# EAGLE board CT_schematic (EAGLE 7.6.0)

Size 100 x 80 mm. Coordinates in mm from the lower left corner, seen from the top.
Outline: 0,0 100,0 100,80 0,80 0,0
Copper layers (1*16): Top 0.035mm / dielectric 1.5mm / Bottom 0.035mm
Design rules "default": minimum track width 10mil, minimum drill 24mil, track to track 8mil, track to pad 8mil, pad to pad 8mil, via to via 8mil, smd to smd 8mil, copper to edge 40mil, drill to drill 8mil, minimum pad ring 10mil, minimum via ring 8mil, stop-mask expansion 4mil, vias tented up to drill 0mil, thermal gap 10mil

## Footprints (pad centres in the part's own frame; a part is rotated, then mirrored left to right if it is on the bottom)
C0603 = smd 0.8 x 0.8: 1 -0.762,0; 2 0.762,0
C0402 = smd 0.5 x 0.5: 1 -0.508,0; 2 0.508,0
C0805 = smd 1.2 x 1.3: 1 -1.016,0; 2 1.016,0
C1210 = smd 1.2 x 2.5: 1 -1.524,0; 2 1.524,0
C1206 = smd 1.3 x 1.6: 1 -1.524,0; 2 1.524,0
EXV-9H = smd 3.505 x 1.676: 1 -2.857,0; 2 2.857,0
L0603 = smd 0.8 x 0.8: 1 -0.762,0; 2 0.762,0
L1210 = smd 1.2 x 2.5: 1 -1.524,0; 2 1.524,0
IND_PM3316 = smd 2.921 x 2.794: 1 -5.144,0; 2 5.144,0
PJ-037B_PACKAGE = drill 3.7 square: 1 12,0 | drill 3.2 square: 2 6,0
R0603 = smd 0.8 x 0.8: 1 -0.762,0; 2 0.762,0
WLCSP81 = smd 0.25 x 0.25: A1 -1.6,1.6; A2 -1.2,1.6; A3 -0.8,1.6; A4 -0.4,1.6; A5 0,1.6; A6 0.4,1.6; A7 0.8,1.6; A8 1.2,1.6; A9 1.6,1.6; B1 -1.6,1.2; B2 -1.2,1.2; B3 -0.8,1.2; B4 -0.4,1.2; B5 0,1.2; B6 0.4,1.2; B7 0.8,1.2; B8 1.2,1.2; B9 1.6,1.2; C1 -1.6,0.8; C2 -1.2,0.8; C3 -0.8,0.8; C4 -0.4,0.8; C5 0,0.8; C6 0.4,0.8; C7 0.8,0.8; C8 1.2,0.8; C9 1.6,0.8; D1 -1.6,0.4; D2 -1.2,0.4; D3 -0.8,0.4; D4 -0.4,0.4; D5 0,0.4; D6 0.4,0.4; D7 0.8,0.4; D8 1.2,0.4; D9 1.6,0.4; E1 -1.6,0; E2 -1.2,0; E3 -0.8,0; E4 -0.4,0; E5 0,0; E6 0.4,0; E7 0.8,0; E8 1.2,0; E9 1.6,0; F1 -1.6,-0.4; F2 -1.2,-0.4; F3 -0.8,-0.4; F4 -0.4,-0.4; F5 0,-0.4; F6 0.4,-0.4; F7 0.8,-0.4; F8 1.2,-0.4; F9 1.6,-0.4; G1 -1.6,-0.8; G2 -1.2,-0.8; G3 -0.8,-0.8; G4 -0.4,-0.8; G5 0,-0.8; G6 0.4,-0.8; G7 0.8,-0.8; G8 1.2,-0.8; G9 1.6,-0.8; H1 -1.6,-1.2; H2 -1.2,-1.2; H3 -0.8,-1.2; H4 -0.4,-1.2; H5 0,-1.2; H6 0.4,-1.2; H7 0.8,-1.2; H8 1.2,-1.2; H9 1.6,-1.2; J1 -1.6,-1.6; J2 -1.2,-1.6; J3 -0.8,-1.6; J4 -0.4,-1.6; J5 0,-1.6; J6 0.4,-1.6; J7 0.8,-1.6; J8 1.2,-1.6; J9 1.6,-1.6
SAMTEC_FTSH-105-01-L-DV-K = smd 0.762 x 2.794: 1 -2.54,-2.032; 2 -2.54,2.032; 3 -1.27,-2.032; 4 -1.27,2.032; 5 0,-2.032; 6 0,2.032; 7 1.27,-2.032; 8 1.27,2.032; 9 2.54,-2.032; 10 2.54,2.032
SSOP-20 = smd 1.651 x 0.432: 1 -3.48,2.925; 2 -3.48,2.275; 3 -3.48,1.625; 4 -3.48,0.975; 5 -3.48,0.325; 6 -3.48,-0.325; 7 -3.48,-0.975; 8 -3.48,-1.625; 9 -3.48,-2.275; 10 -3.48,-2.925; 11 3.48,-2.925; 12 3.48,-2.275; 13 3.48,-1.625; 14 3.48,-0.975; 15 3.48,-0.325; 16 3.48,0.325; 17 3.48,0.975; 18 3.48,1.625; 19 3.48,2.275; 20 3.48,2.925
182-009-MALE = drill 1.194 pad 1.524 octagon: 1 -5.537,10.923; 2 -2.769,10.923; 3 0,10.923; 4 2.769,10.923; 5 5.537,10.923; 6 -4.153,8.08; 7 -1.384,8.08; 8 1.384,8.08; 9 4.153,8.08 | hole 3.048: -12.446,9.501; 12.446,9.501
WNG008 = smd 0.45 x 0.55: 1 -1.27,0; 2 0,0; 3 1.27,0; 4 2.54,0; 5 2.54,7.5; 6 1.27,7.5; 7 0,7.5; 8 -1.27,7.53 | smd 4.9 x 4.75: PAD 0.635,3.75
QFN-32 = smd 0.6 x 0.3: 1 -2.3,1.75; 2 -2.3,1.25; 3 -2.3,0.75; 4 -2.3,0.25; 5 -2.3,-0.25; 6 -2.3,-0.75; 7 -2.3,-1.25; 8 -2.3,-1.75; 17 2.3,-1.75; 18 2.3,-1.25; 19 2.3,-0.75; 20 2.3,-0.25; 21 2.3,0.25; 22 2.3,0.75; 23 2.3,1.25; 24 2.3,1.75 | smd 0.3 x 0.6: 9 -1.75,-2.3; 10 -1.25,-2.3; 11 -0.75,-2.3; 12 -0.25,-2.3; 13 0.25,-2.3; 14 0.75,-2.3; 15 1.25,-2.3; 16 1.75,-2.3; 25 1.75,2.3; 26 1.25,2.3; 27 0.75,2.3; 28 0.25,2.3; 29 -0.25,2.3; 30 -0.75,2.3; 31 -1.25,2.3; 32 -1.75,2.3 | smd 3.2 x 3.2: EXP 0,0
SJ-43515TS-SMT-TR = smd 2.2 x 3: 1 0.6,-7.4; 4 3.4,-7.4 | smd 3 x 3: 2 12.8,-7.4; 5 17,-3 | smd 2 x 3: 3 5.3,0; 6 2.5,0 | drill 1.8: P$7 4.5,-3.69; P$8 11.54,-3.69
WM-64PC = drill 0.6 pad 1: 1 -1,0.95; 2 -1,-0.95
QFN-28 = smd 0.813 x 0.305: 1 -2.451,1.5; 2 -2.451,1; 3 -2.451,0.5; 4 -2.451,0; 5 -2.451,-0.5; 6 -2.451,-1; 7 -2.451,-1.5; 15 2.451,-1.5; 16 2.451,-1; 17 2.451,-0.5; 18 2.451,0; 19 2.451,0.5; 20 2.451,1; 21 2.451,1.5 | smd 0.305 x 0.813: 8 -1.5,-2.451; 9 -1,-2.451; 10 -0.5,-2.451; 11 0,-2.451; 12 0.5,-2.451; 13 1,-2.451; 14 1.5,-2.451; 22 1.5,2.451; 23 1,2.451; 24 0.5,2.451; 25 0,2.451; 26 -0.5,2.451; 27 -1,2.451; 28 -1.5,2.451 | smd 3.607 x 3.607: 29 0,0
ABLS-25.000MHZ-B2F-T = smd 5.6 x 2.8: 1 -3.81,0; 2 5.69,0
ASEK = smd 1.4 x 1: 1 -1.1,-0.8; 2 1.1,-0.8; 3 1.1,0.8; 4 -1.1,0.8
ASFL1 = smd 1.7 x 1.5: 1 -1.27,-1.1; 2 1.27,-1.1; 3 1.27,1.1; 4 -1.27,1.1
WSON-8 = smd 0.3 x 0.6: 1 -0.75,0; 2 0.05,0; 3 0.85,0; 4 1.65,0; 5 1.65,3.8; 6 0.85,3.8; 7 0.05,3.8; 8 -0.75,3.8 | smd 3 x 2.6: PAD 0.45,1.9
HTSSOP14 = smd 1.676 x 0.356: 1 -2.8,1.95; 2 -2.8,1.3; 3 -2.8,0.65; 4 -2.8,0; 5 -2.8,-0.65; 6 -2.8,-1.3; 7 -2.8,-1.95; 8 2.8,-1.95; 9 2.8,-1.3; 10 2.8,-0.65; 11 2.8,0; 12 2.8,0.65; 13 2.8,1.3; 14 2.8,1.95 | smd 3 x 5: 15 0,0 | drill 0.4 pad 0.45: P$1 -0.75,1.5; P$2 0.75,1.5; P$3 -0.75,0; P$4 0.8,0; P$5 -0.75,-1.5; P$6 0.9,-1.5
SON-6 = smd 0.55 x 0.3: 1 -0.355,0.5 | smd 0.52 x 0.3: 2 -0.37,0; 3 -0.37,-0.5; 4 0.37,-0.5; 5 0.37,0; 6 0.37,0.5
SW_4-1437565-2 = smd 1.4 x 2.1: 1 -2.23,4.55; 2 -2.23,-4.55; 3 2.23,4.55; 4 2.23,-4.55
LGM67K-G1J2-24-Z = smd 0.8 x 1.4: A -2,0; C 0,0
NC7SZ125M5X = smd 1.3 x 0.7: 1 -1.3,0.95; 2 -1.3,0; 3 -1.3,-0.95; 4 1.3,-0.95; 5 1.3,0.95

## Placement (x,y rotation side)
C1  1e-06  [C0603]  -76.2,95.25 0 top  (outside the outline)
C2  1e-07  [C0603]  -80.01,95.25 0 top  (outside the outline)
C3  1e-07  [C0603]  -83.82,95.25 0 top  (outside the outline)
C4  1e-07  [C0603]  -87.63,95.25 0 top  (outside the outline)
C5  1e-07  [C0603]  -91.44,95.25 0 top  (outside the outline)
C6  1e-07  [C0603]  -95.25,95.25 0 top  (outside the outline)
C7  4.7e-06  [C0603]  -64.77,95.25 0 top  (outside the outline)
C8  1e-08  [C0603]  -99.06,95.25 0 top  (outside the outline)
C9  1e-06  [C0603]  -15.24,100.33 0 top  (outside the outline)
C10  1e-07  [C0603]  -19.05,100.33 0 top  (outside the outline)
C11  2.2e-06  [C0603]  -68.58,95.25 0 top  (outside the outline)
C12  2.2e-06  [C0603]  -72.39,95.25 0 top  (outside the outline)
C13  1e-11  [C0402]  -24.13,105.41 0 top  (outside the outline)
C14  1e-11  [C0402]  -27.94,105.41 0 top  (outside the outline)
C15  1e-07  [C0402]  -31.75,105.41 0 top  (outside the outline)
C16  1e-06  [C0603]  -22.86,100.33 0 top  (outside the outline)
C17  1e-06  [C0603]  -26.67,100.33 0 top  (outside the outline)
C18  1e-06  [C0603]  -30.48,100.33 0 top  (outside the outline)
C19  4.7e-06  [C0805]  -86.36,82.55 0 top  (outside the outline)
C20  1e-08  [C0402]  -35.56,105.41 0 top  (outside the outline)
C21  1e-06  [C0603]  -34.29,100.33 0 top  (outside the outline)
C22  1e-06  [C0603]  -38.1,100.33 0 top  (outside the outline)
C23  1e-06  [C0603]  -41.91,100.33 0 top  (outside the outline)
C24  1e-06  [C0603]  -45.72,100.33 0 top  (outside the outline)
C25  1e-06  [C0603]  -49.53,100.33 0 top  (outside the outline)
C26  1e-06  [C0603]  -53.34,100.33 0 top  (outside the outline)
C27  1e-06  [C0603]  -57.15,100.33 0 top  (outside the outline)
C28  1e-07  [C0402]  -39.37,105.41 0 top  (outside the outline)
C29  1e-07  [C0402]  -43.18,105.41 0 top  (outside the outline)
C30  1e-07  [C0402]  -46.99,105.41 0 top  (outside the outline)
C31  1e-07  [C0402]  -50.8,105.41 0 top  (outside the outline)
C32  1e-06  [C0603]  -60.96,100.33 0 top  (outside the outline)
C33  2.2e-05  [C1210]  -24.13,83.82 0 top  (outside the outline)
C34  2.2e-05  [C1210]  -30.48,83.82 0 top  (outside the outline)
C35  1e-09  [C0402]  -54.61,105.41 0 top  (outside the outline)
C36  1e-09  [C0402]  -58.42,105.41 0 top  (outside the outline)
C37  1e-07  [C0402]  -62.23,105.41 0 top  (outside the outline)
C38  1e-07  [C0402]  -66.04,105.41 0 top  (outside the outline)
C39  1e-07  [C0402]  -69.85,105.41 0 top  (outside the outline)
C40  1e-07  [C0402]  -73.66,105.41 0 top  (outside the outline)
C41  1e-07  [C0402]  -77.47,105.41 0 top  (outside the outline)
C42  1e-05  [C0805]  -91.44,82.55 0 top  (outside the outline)
C43  1e-05  [C0805]  -96.52,82.55 0 top  (outside the outline)
C44  1e-05  [C0805]  -15.24,90.17 0 top  (outside the outline)
C45  1e-05  [C0805]  -20.32,90.17 0 top  (outside the outline)
C46  1e-05  [C0805]  -25.4,90.17 0 top  (outside the outline)
C47  1e-08  [C0402]  -81.28,105.41 0 top  (outside the outline)
C48  1e-08  [C0402]  -85.09,105.41 0 top  (outside the outline)
C49  1e-08  [C0402]  -88.9,105.41 0 top  (outside the outline)
C50  1e-08  [C0402]  -92.71,105.41 0 top  (outside the outline)
C51  1e-05  [C1210]  -36.83,83.82 0 top  (outside the outline)
C52  1e-05  [C0805]  -30.48,90.17 0 top  (outside the outline)
C53  1e-06  [C0603]  -64.77,100.33 0 top  (outside the outline)
C54  3.3e-09  [C0402]  -20.32,105.41 0 top  (outside the outline)
C55  1e-07  [C0402]  -96.52,105.41 0 top  (outside the outline)
C56  2.2e-05  [C1210]  -43.18,83.82 0 top  (outside the outline)
C57  2.2e-05  [C1210]  -49.53,83.82 0 top  (outside the outline)
C58  1e-05  [C1206]  -62.23,83.82 0 top  (outside the outline)
C59  1e-05  [C1206]  -68.58,83.82 0 top  (outside the outline)
C60  1e-07  [C0402]  -100.33,105.41 0 top  (outside the outline)
C61  0.0001  [EXV-9H]  -38.1,76.2 0 top  (outside the outline)
C62  0.0001  [EXV-9H]  -49.53,76.2 0 top  (outside the outline)
C63  1e-08  [C0402]  -15.24,110.49 0 top  (outside the outline)
C64  1e-08  [C0402]  -19.05,110.49 0 top  (outside the outline)
F1  240.0  [L0603]  -68.58,100.33 0 top  (outside the outline)
I1  1.5e-05  [L1210]  -55.88,83.82 0 top  (outside the outline)
I2  1e-05  [IND_PM3316]  -68.58,55.88 0 top  (outside the outline)
J1  PJ-037B  [PJ-037B_PACKAGE]  -83.82,43.18 0 top  (outside the outline)
R2  1000.0  [R0603]  -72.39,100.33 0 top  (outside the outline)
R7  4700.0  [R0603]  -76.2,100.33 0 top  (outside the outline)
R8  10000.0  [R0603]  -74.93,88.9 0 top  (outside the outline)
R9  10000.0  [R0603]  -80.01,88.9 0 top  (outside the outline)
R10  10000.0  [R0603]  -85.09,88.9 0 top  (outside the outline)
R11  10000.0  [R0603]  -90.17,88.9 0 top  (outside the outline)
R12  10000.0  [R0603]  -95.25,88.9 0 top  (outside the outline)
R13  10000.0  [R0603]  -100.33,88.9 0 top  (outside the outline)
R14  10000.0  [R0603]  -15.24,95.25 0 top  (outside the outline)
R15  5.0  [R0603]  -80.01,100.33 0 top  (outside the outline)
R16  100000.0  [R0603]  -44.45,88.9 0 top  (outside the outline)
R17  100000.0  [R0603]  -49.53,88.9 0 top  (outside the outline)
R18  100000.0  [R0603]  -54.61,88.9 0 top  (outside the outline)
R19  10000.0  [R0603]  -20.32,95.25 0 top  (outside the outline)
R20  10000.0  [R0603]  -25.4,95.25 0 top  (outside the outline)
R21  10000.0  [R0603]  -30.48,95.25 0 top  (outside the outline)
R22  1270.0  [R0603]  -83.82,100.33 0 top  (outside the outline)
R23  1270.0  [R0603]  -87.63,100.33 0 top  (outside the outline)
R24  47000.0  [R0603]  -35.56,95.25 0 top  (outside the outline)
R25  47000.0  [R0603]  -40.64,95.25 0 top  (outside the outline)
R26  47000.0  [R0603]  -45.72,95.25 0 top  (outside the outline)
R27  680.0  [R0603]  -91.44,100.33 0 top  (outside the outline)
R28  100000.0  [R0603]  -59.69,88.9 0 top  (outside the outline)
R29  200.0  [R0603]  -95.25,100.33 0 top  (outside the outline)
R30  1000.0  [R0603]  -99.06,100.33 0 top  (outside the outline)
R31  71007.101651032  [R0603]  -39.37,88.9 0 top  (outside the outline)
R32  22000.0  [R0603]  -50.8,95.25 0 top  (outside the outline)
R33  10000.0  [R0603]  -55.88,95.25 0 top  (outside the outline)
R34  10000.0  [R0603]  -60.96,95.25 0 top  (outside the outline)
R35  9100.0  [R0603]  -15.24,105.41 0 top  (outside the outline)
R36  680000.0  [R0603]  -64.77,88.9 0 top  (outside the outline)
R37  120000.0  [R0603]  -69.85,88.9 0 top  (outside the outline)
U1  STM32F446MCY6  [WLCSP81]  -83.82,67.31 0 top  (outside the outline)
U2  FTSH-105-01-L-DV-K  [SAMTEC_FTSH-105-01-L-DV-K]  -76.2,7.62 0 top  (outside the outline)
U3  MAX3218EAP+T  [SSOP-20]  -96.52,54.61 0 top  (outside the outline)
U4  182-009-113R531  [182-009-MALE]  -36.83,6.35 0 top  (outside the outline)
U5  S25FL128SDPNFI001  [WNG008]  -48.26,53.34 0 top  (outside the outline)
U6  SGTL5000XNAA3  [QFN-32]  -86.36,55.88 0 top  (outside the outline)
U7  SJ-43515TS-SMT-TR  [SJ-43515TS-SMT-TR]  -39.37,31.75 0 top  (outside the outline)
U8  SJ-43515TS-SMT-TR  [SJ-43515TS-SMT-TR]  -67.31,31.75 0 top  (outside the outline)
U9  SJ-43515TS-SMT-TR  [SJ-43515TS-SMT-TR]  -95.25,31.75 0 top  (outside the outline)
U10  WM-64PCT  [WM-64PC]  -58.42,55.88 0 top  (outside the outline)
U11  WM8731CLSEFL  [QFN-28]  -16.51,83.82 0 top  (outside the outline)
U12  SJ-43515TS-SMT-TR  [SJ-43515TS-SMT-TR]  -39.37,45.72 0 top  (outside the outline)
U13  SJ-43515TS-SMT-TR  [SJ-43515TS-SMT-TR]  -67.31,45.72 0 top  (outside the outline)
U14  ABLS-25.000MHZ-B2F-T  [ABLS-25.000MHZ-B2F-T]  -68.58,76.2 0 top  (outside the outline)
U15  ASEK-32.768KHz-ECST  [ASEK]  -29.21,76.2 0 top  (outside the outline)
U16  ASFL1-12.288MHZ-EC-T  [ASFL1]  -50.8,67.31 0 top  (outside the outline)
U17  ASFL-24.57MHZ-NCS  [ASFL1]  -68.58,67.31 0 top  (outside the outline)
U18  LP3878SDX-ADJ/NOPB  [WSON-8]  -30.48,66.04 0 top  (outside the outline)
U19  tps54225PWP  [HTSSOP14]  -80.01,76.2 0 top  (outside the outline)
U20  TPS3895ADRYR  [SON-6]  -21.59,109.22 0 top  (outside the outline)
U21  4-1437565-2  [SW_4-1437565-2]  -27.94,57.15 0 top  (outside the outline)
U22  Q65110A2395  [LGM67K-G1J2-24-Z]  -88.9,76.2 0 top  (outside the outline)
U23  nc7sz125m5x  [NC7SZ125M5X]  -73.66,82.55 0 top  (outside the outline)
U24  nc7sz125m5x  [NC7SZ125M5X]  -80.01,82.55 0 top  (outside the outline)

## Library data of the parts
C1-C64 F1 I1 I2 J1 R2 R7-R37 U1-U24 = circuit_tree

## Nets
CLK_CRYSTAL_U1_E9: C13.1 U1.E9 U14.1
CLK_CRYSTAL_U1_F9: C14.1 U1.F9 U14.2
CLK_U1_C9: U1.C9 U15.3
CLK_U6_21: U6.21 U17.3
CLK_U11_1: U11.1 U16.3
GND: C1.2 C2.2 C3.2 C4.2 C5.2 C6.2 C7.2 C8.2 C9.2 C10.2 C11.2 C12.2 C13.2 C14.2 C15.2 C16.2 C17.2 C18.2 C20.2 C28.2 C29.2 C30.2 C31.2 C32.2 C36.2 C37.2 C38.2 C39.2 C40.2 C41.2 C42.2 C43.2 C44.2 C45.2 C46.2 C47.2 C48.2 C49.2 C50.2 C51.2 C52.2 C53.2 C54.2 C56.2 C57.2 C58.2 C59.2 C60.2 C61.2 C62.2 C63.2 C64.2 J1.2 R2.2 R8.2 R10.2 R14.2 R15.2 R23.2 R24.2 R25.2 R26.2 R30.2 R32.2 R35.2 R37.2 U1.B1 U1.B7 U1.F7 U1.G8 U1.H3 U2.3 U2.5 U3.5 U3.17 U3.20 U4.5 U5.4 U5.PAD U6.1 U6.3 U6.7 U6.EXP U8.1 U9.1 U10.2 U11.4 U11.15 U11.19 U11.25 U11.26 U11.29 U12.1 U13.1 U15.2 U16.2 U17.2 U18.3 U18.PAD U19.5 U19.8 U19.9 U19.15 U20.2 U22.C U23.2 U23.3 U24.1 U24.3
NET_U1_A7: R8.1 U1.A7
NET_U1_B8: R9.1 U1.B8
NET_U1_C2: C12.1 U1.C2
NET_U1_D8: R7.1 U1.D8 U24.4
NET_U1_H8: C8.1 C9.1 F1.1 U1.H8
NET_U1_J3: C11.1 U1.J3
NET_U1_J7: U22.A
NET_U1_J8: R10.1 U1.J8
NET_U1_J9: U21.3 U21.4
NET_U2_9: R15.1 U2.9
NET_U3_1: I1.1 U3.1
NET_U3_2: R16.1 U3.2
NET_U3_3: R17.1 U3.3
NET_U3_4: R18.1 U3.4
NET_U3_15: C18.1 U3.15
NET_U3_16: C19.2 U3.16
NET_U3_18: C19.1 U3.18
NET_U3_19: C17.1 U3.19
NET_U4_2: U3.12 U4.2
NET_U4_3: U3.14 U4.3
NET_U4_7: U3.11 U4.7
NET_U4_8: U3.13 U4.8
NET_U5_3: R19.1 U5.3
NET_U5_7: R21.1 U5.7
NET_U6_10: C31.1 U6.10
NET_U6_29: R22.1 U6.29
NET_U6_31: R23.1 U6.31
NET_U7_1: U6.4 U7.1
NET_U7_2: U6.2 U7.2
NET_U7_5: U6.6 U7.5
NET_U8_2: C22.1 U8.2
NET_U8_5: C21.1 U8.5
NET_U8_11: C22.2
NET_U8_12: C21.2
NET_U9_2: C24.1 C25.1 U9.2
NET_U9_5: C23.1 U9.5
NET_U9_13: C24.2 C25.2
NET_U9_14: C23.2
NET_U10_1: C26.1 C27.1 C32.1 U6.16 U10.1
NET_U10_15: C26.2 C27.2
NET_U11_9: U11.9
NET_U11_20: C41.1 C46.1 U11.20
NET_U12_2: C34.1 R25.1 U12.2
NET_U12_5: C33.1 R24.1 U12.5
NET_U12_13: C33.2
NET_U12_14: C34.2
NET_U13_5: C35.1 C36.1 R26.1 R27.1 U13.5
NET_U13_21: R27.2
NET_U13_22: C35.2
NET_U18_1: C50.1 U18.1
NET_U18_6: R29.2 R30.1 U18.6
NET_U18_8: R28.1 U18.8
NET_U19_2: R31.2 R32.1 U19.2
NET_U19_3: C53.1 U19.3
NET_U19_4: C54.1 U19.4
NET_U19_10: C55.1 I2.1 U19.10 U19.11
NET_U19_12: C55.2 U19.12
NET_U20_1: R34.1 R35.1 U20.1
NET_U20_3: R36.2 R37.1 U20.3
NET_U20_4: R33.1 U20.4 U23.4 U24.2
NET_U21_1: R2.1 U21.1 U21.2
PROC_I2S1_CK: U1.F6 U6.24
PROC_I2S1_SD: U1.A6 U6.26
PROC_I2S1_WS: U1.H7 U6.23
PROC_I2S2_CK: U1.F2 U11.7
PROC_I2S2_SD: U1.F8 U11.8
PROC_I2S2_WS: U1.B5 U11.9 U11.11
PROC_SPI2_MISO: U1.E8 U5.2
PROC_SPI2_MOSI: U1.G3 U5.5
PROC_SPI2_NSS: R20.1 U1.C4 U5.1
PROC_SPI2_SCK: U1.F4 U5.6
PROC_SYS_JTCK_SWCLK: R14.1 U1.C3 U2.4
PROC_SYS_JTDI: R12.1 U1.B2 U2.8
PROC_SYS_JTDO_SWO: U1.A5 U2.6
PROC_SYS_JTMS_SWDIO: R13.1 U1.D2 U2.2
PROC_UART5_CTS: U1.D1 U3.8
PROC_UART5_RTS: U1.F3 U3.10
PROC_UART5_RX: U1.D5 U3.9
PROC_UART5_TX: U1.A2 U3.7
RST_OUT_U2_JTAG_RST_B: R11.1 U2.10 U23.1
VCC_S1_11V7: C51.1 C58.1 C59.1 C61.1 C62.1 J1.1 R28.2 U18.4 U19.7 U19.13 U19.14
VCC_TIER1_1V2: C28.1 C52.1 R29.1 U6.30 U18.5
VCC_TIER1_3V3: C1.1 C2.1 C3.1 C4.1 C5.1 C6.1 C7.1 C10.1 C15.1 C16.1 C20.1 C29.1 C30.1 C37.1 C38.1 C39.1 C40.1 C42.1 C43.1 C44.1 C45.1 C47.1 C48.1 C49.1 C56.1 C57.1 C60.1 C63.1 C64.1 F1.2 I1.2 I2.2 R7.2 R9.2 R11.2 R12.2 R13.2 R16.2 R17.2 R18.2 R19.2 R20.2 R21.2 R22.2 R31.1 R33.2 R34.2 R36.1 U1.A1 U1.A8 U1.B9 U1.E1 U1.H9 U1.J2 U2.1 U3.6 U5.8 U6.5 U6.20 U11.3 U11.5 U11.12 U11.18 U15.4 U16.4 U17.4 U19.1 U20.6 U23.5 U24.5

## Tracks (layer width: path | path; a pad name or v marks a point on that pad's centre or on a via)
CLK_CRYSTAL_U1_E9  (2 unrouted)
CLK_CRYSTAL_U1_F9  (2 unrouted)
CLK_U1_C9  (1 unrouted)
CLK_U6_21  (1 unrouted)
CLK_U11_1  (1 unrouted)
GND  (108 unrouted)
NET_U1_A7  (1 unrouted)
NET_U1_B8  (1 unrouted)
NET_U1_C2  (1 unrouted)
NET_U1_D8  (2 unrouted)
NET_U1_H8  (3 unrouted)
NET_U1_J3  (1 unrouted)
NET_U1_J8  (1 unrouted)
NET_U1_J9  (1 unrouted)
NET_U2_9  (1 unrouted)
NET_U3_1  (1 unrouted)
NET_U3_2  (1 unrouted)
NET_U3_3  (1 unrouted)
NET_U3_4  (1 unrouted)
NET_U3_15  (1 unrouted)
NET_U3_16  (1 unrouted)
NET_U3_18  (1 unrouted)
NET_U3_19  (1 unrouted)
NET_U4_2  (1 unrouted)
NET_U4_3  (1 unrouted)
NET_U4_7  (1 unrouted)
NET_U4_8  (1 unrouted)
NET_U5_3  (1 unrouted)
NET_U5_7  (1 unrouted)
NET_U6_10  (1 unrouted)
NET_U6_29  (1 unrouted)
NET_U6_31  (1 unrouted)
NET_U7_1  (1 unrouted)
NET_U7_2  (1 unrouted)
NET_U7_5  (1 unrouted)
NET_U8_2  (1 unrouted)
NET_U8_5  (1 unrouted)
NET_U9_2  (2 unrouted)
NET_U9_5  (1 unrouted)
NET_U9_13  (1 unrouted)
NET_U10_1  (4 unrouted)
NET_U10_15  (1 unrouted)
NET_U11_20  (2 unrouted)
NET_U12_2  (2 unrouted)
NET_U12_5  (2 unrouted)
NET_U13_5  (4 unrouted)
NET_U18_1  (1 unrouted)
NET_U18_6  (2 unrouted)
NET_U18_8  (1 unrouted)
NET_U19_2  (2 unrouted)
NET_U19_3  (1 unrouted)
NET_U19_4  (1 unrouted)
NET_U19_10  (3 unrouted)
NET_U19_12  (1 unrouted)
NET_U20_1  (2 unrouted)
NET_U20_3  (2 unrouted)
NET_U20_4  (3 unrouted)
NET_U21_1  (2 unrouted)
PROC_I2S1_CK  (1 unrouted)
PROC_I2S1_SD  (1 unrouted)
PROC_I2S1_WS  (1 unrouted)
PROC_I2S2_CK  (1 unrouted)
PROC_I2S2_SD  (1 unrouted)
PROC_I2S2_WS  (2 unrouted)
PROC_SPI2_MISO  (1 unrouted)
PROC_SPI2_MOSI  (1 unrouted)
PROC_SPI2_NSS  (2 unrouted)
PROC_SPI2_SCK  (1 unrouted)
PROC_SYS_JTCK_SWCLK  (2 unrouted)
PROC_SYS_JTDI  (2 unrouted)
PROC_SYS_JTDO_SWO  (1 unrouted)
PROC_SYS_JTMS_SWDIO  (2 unrouted)
PROC_UART5_CTS  (1 unrouted)
PROC_UART5_RTS  (1 unrouted)
PROC_UART5_RX  (1 unrouted)
PROC_UART5_TX  (1 unrouted)
RST_OUT_U2_JTAG_RST_B  (2 unrouted)
VCC_S1_11V7  (10 unrouted)
VCC_TIER1_1V2  (4 unrouted)
VCC_TIER1_3V3  (69 unrouted)